# EAGLE board PROJECT_V2 (EAGLE 8.7.0)
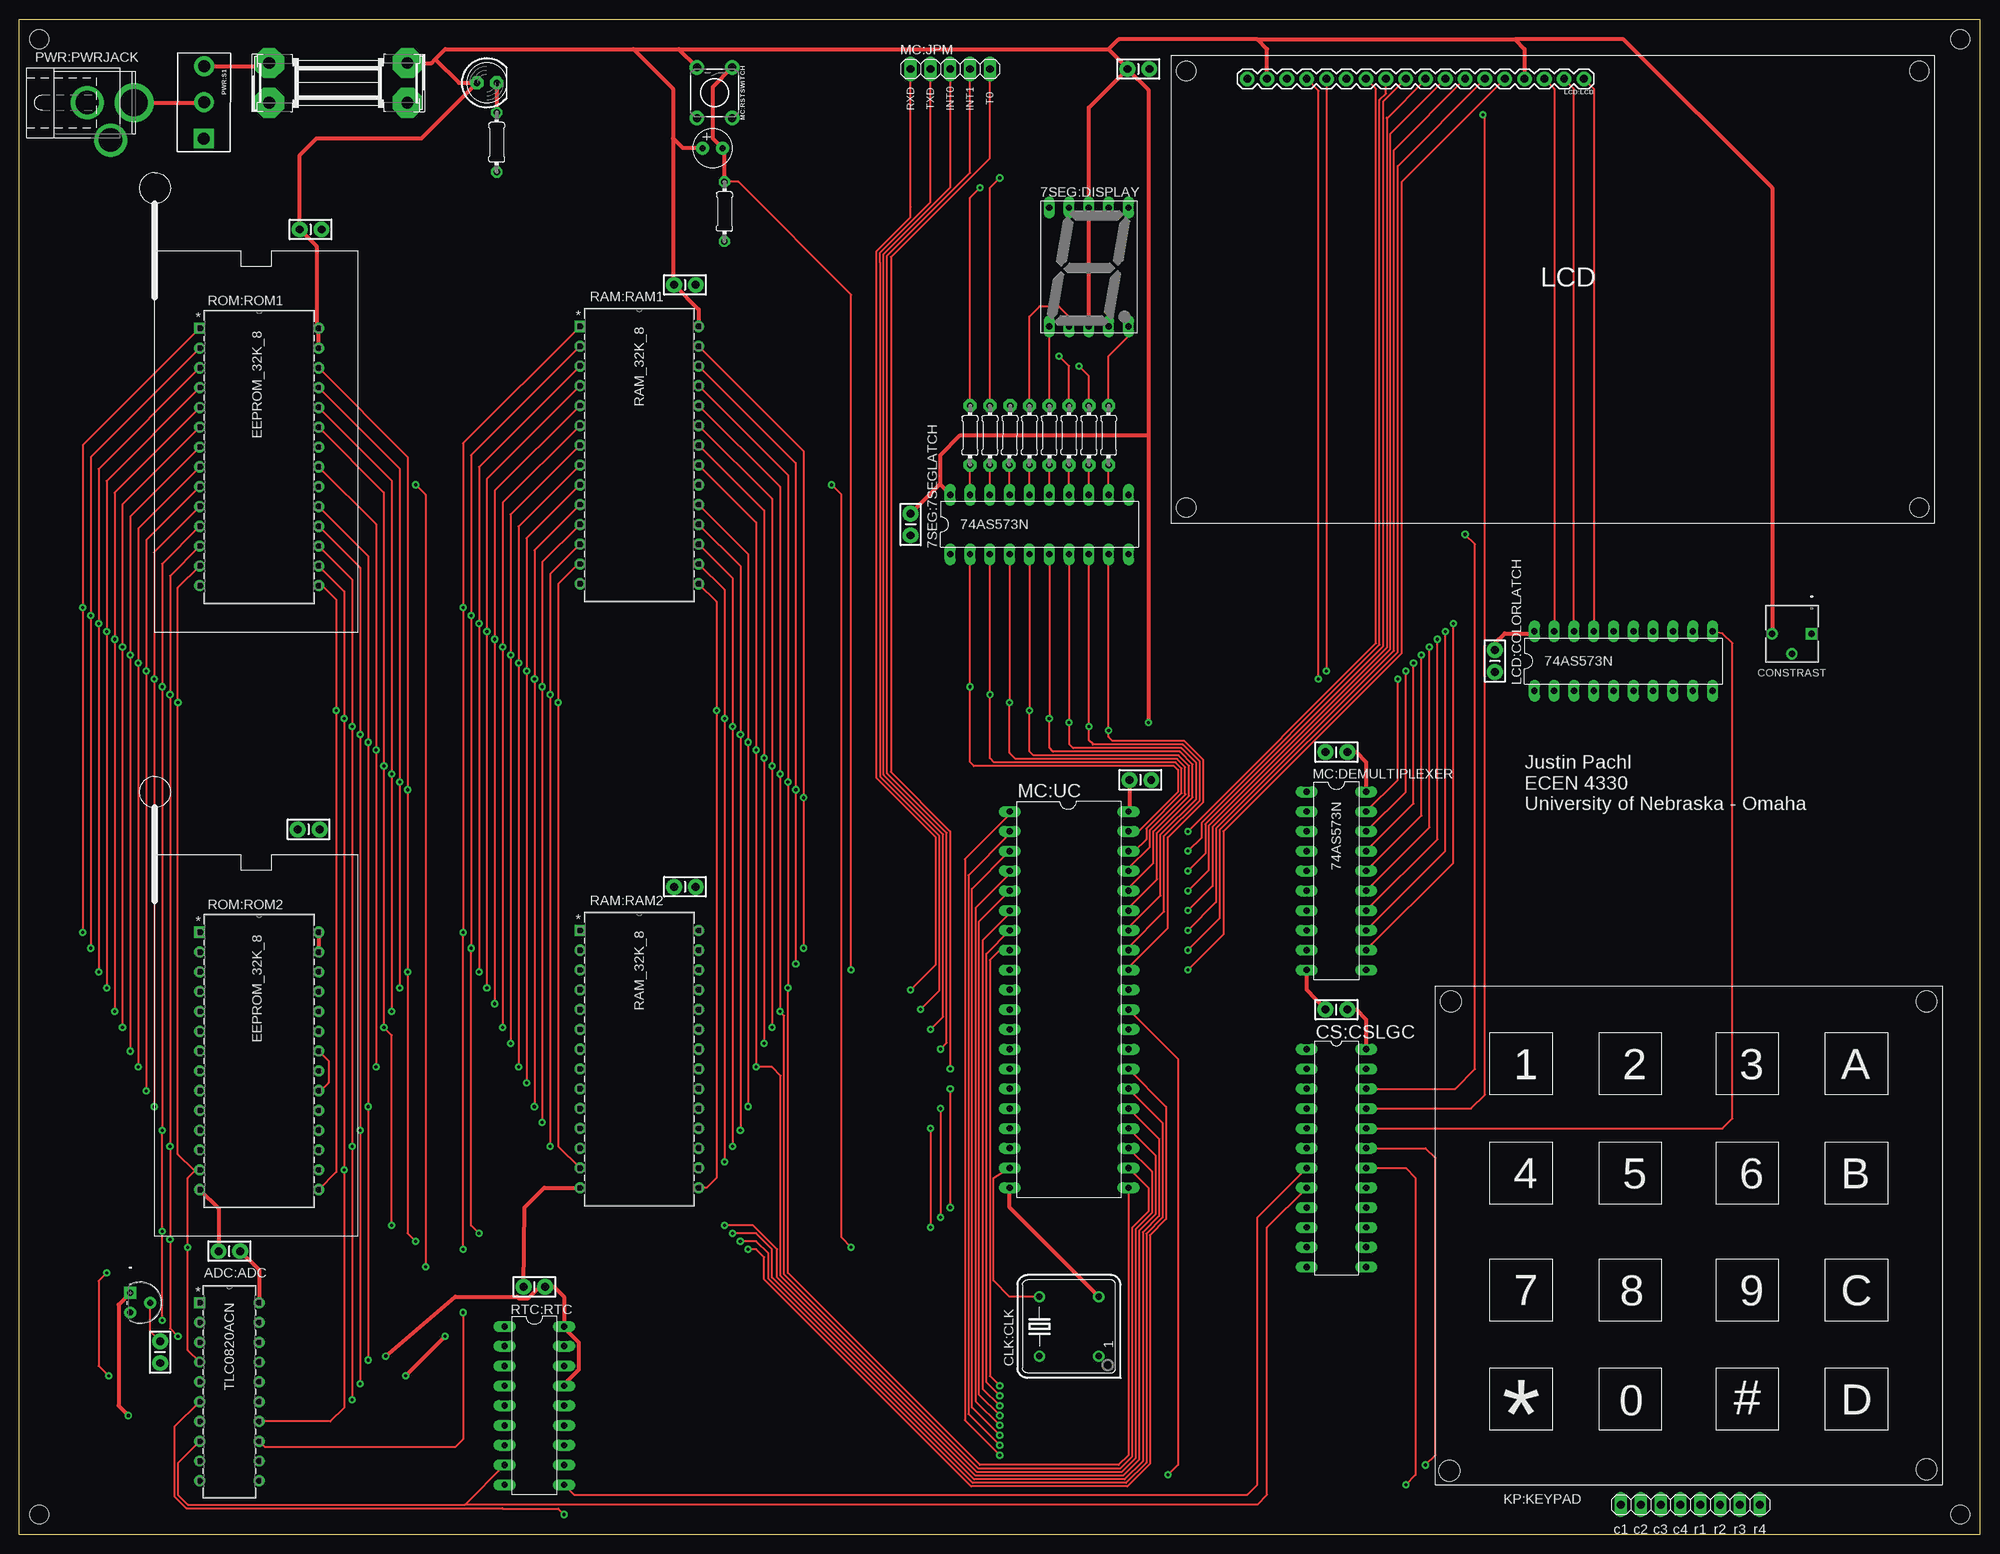
[diagram p0: board, top side]
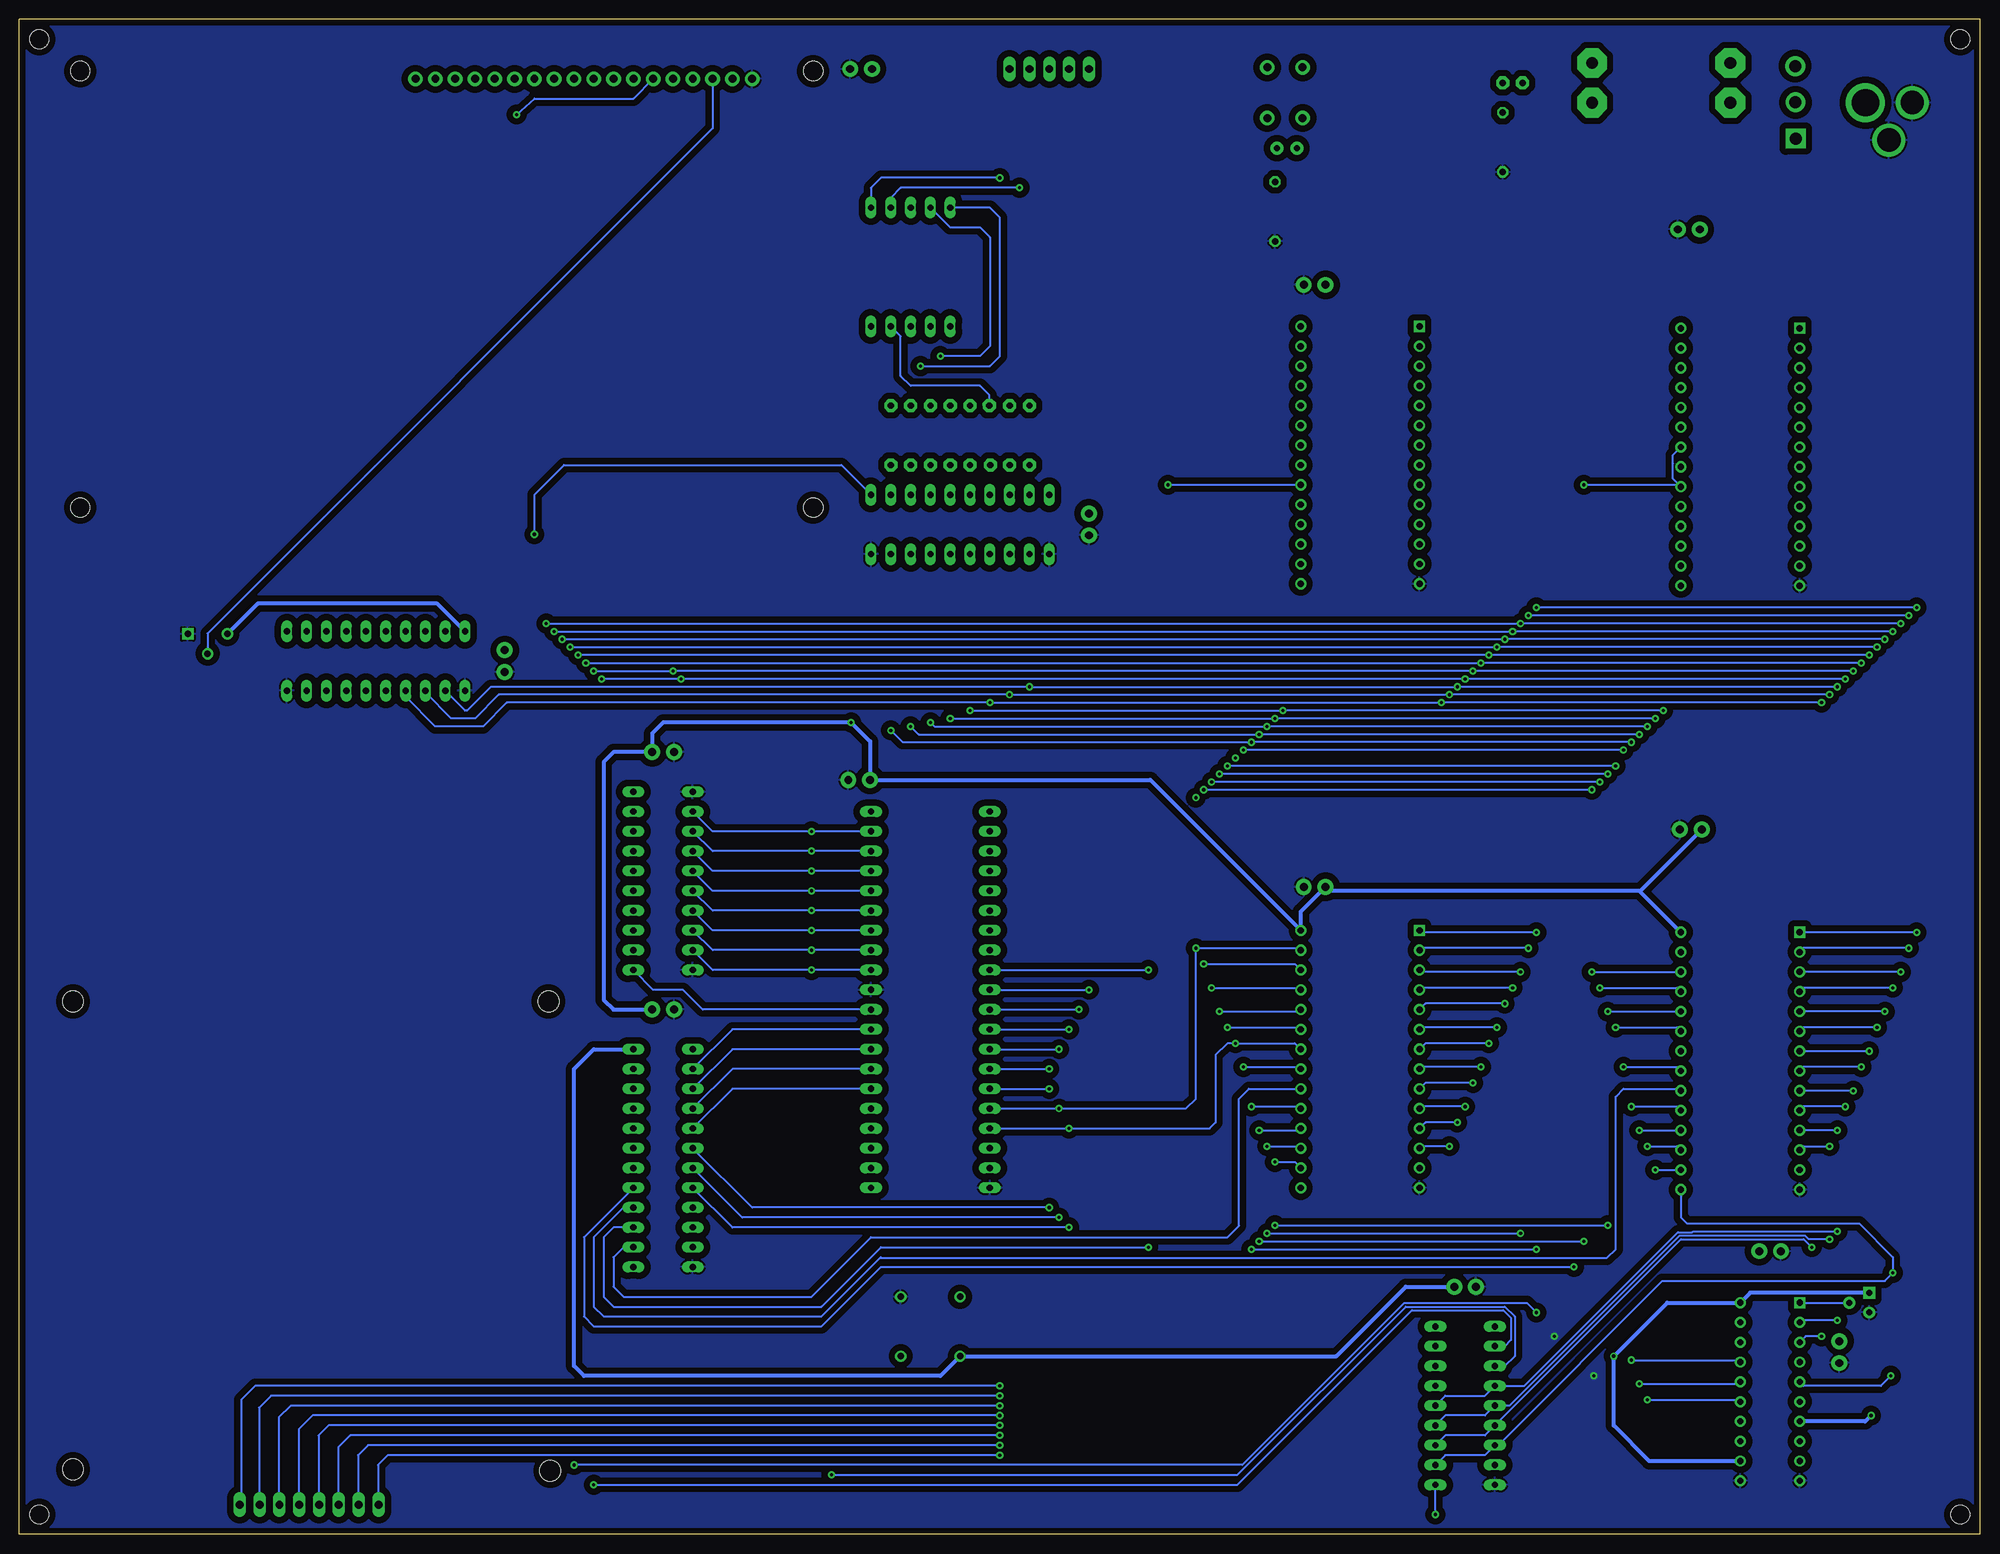
[diagram p1: board, bottom side, seen from below]

Size 251.46 x 194.31 mm. Coordinates in mm from the lower left corner, seen from the top.
Outline: 0,0 251.46,0 251.46,194.31 0,194.31 0,0
Copper layers (1*16): Top 0.035mm / dielectric 1.5mm / Bottom 0.035mm
Design rules "PROJECT_V2": minimum track width 8mil, minimum drill 15mil, track to track 0.205mm, track to pad 0.205mm, pad to pad 0.205mm, via to via 0.205mm, smd to smd 8mil, copper to edge 10mil, drill to drill 8mil, minimum pad ring 12mil, minimum via ring 10mil, stop-mask expansion 4mil, vias tented up to drill 25mil, thermal gap 10mil
Net classes: 0 default: clearance 0.205 mm
Holes 2.44 mm at 248.92,191.77 2.54,191.77 2.54,2.54 248.92,2.54

## Footprints (pad centres in the part's own frame; a part is rotated, then mirrored left to right if it is on the bottom)
DIL20 = drill 0.813 long: 1 -11.43,-3.81; 2 -8.89,-3.81; 3 -6.35,-3.81; 4 -3.81,-3.81; 5 -1.27,-3.81; 6 1.27,-3.81; 7 3.81,-3.81; 8 6.35,-3.81; 9 8.89,-3.81; 10 11.43,-3.81; 11 11.43,3.81; 12 8.89,3.81; 13 6.35,3.81; 14 3.81,3.81; 15 1.27,3.81; 16 -1.27,3.81; 17 -3.81,3.81; 18 -6.35,3.81; 19 -8.89,3.81; 20 -11.43,3.81
CAP-PTH-SMALL-KIT = drill 1.016 pad 2.032: 1 -1.397,0; 2 1.397,0
754-1460-5-ND = drill 0.813 long: 1 -5.08,-7.62; 2 -2.54,-7.62; 3 0,-7.62; 4 2.54,-7.62; 5 5.08,-7.62; 6 5.08,7.62; 7 2.54,7.62; 8 0,7.62; 9 -2.54,7.62; 10 -5.08,7.62
0204/7 = drill 0.813 pad 1.676 octagon: 1 -3.81,0; 2 3.81,0
N20 = drill 0.787 pad 1.295 square: 1 -7.62,22.86 | drill 0.787 pad 1.295: 2 -7.62,20.32; 3 -7.62,17.78; 4 -7.62,15.24; 5 -7.62,12.7; 6 -7.62,10.16; 7 -7.62,7.62; 8 -7.62,5.08; 9 -7.62,2.54; 10 -7.62,0; 11 0,0; 12 0,2.54; 13 0,5.08; 14 0,7.62; 15 0,10.16; 16 0,12.7; 17 0,15.24; 18 0,17.78; 19 0,20.32; 20 0,22.86
T_3 = drill 0.762 pad 1.524 square: 1 -2.54,-2.54 | drill 0.762 pad 1.524: 2 -1.27,0; 3 0,-2.54
DIL08S = drill 0.813: 1 -3.81,-3.81; 4 3.81,-3.81; 5 3.81,3.81; 8 -3.81,3.81
DIL24-3 = drill 0.813 long: 1 -13.97,-3.81; 2 -11.43,-3.81; 3 -8.89,-3.81; 4 -6.35,-3.81; 5 -3.81,-3.81; 6 -1.27,-3.81; 7 1.27,-3.81; 8 3.81,-3.81; 9 6.35,-3.81; 10 8.89,-3.81; 11 11.43,-3.81; 12 13.97,-3.81; 13 13.97,3.81; 14 11.43,3.81; 15 8.89,3.81; 16 6.35,3.81; 17 3.81,3.81; 18 1.27,3.81; 19 -1.27,3.81; 20 -3.81,3.81; 21 -6.35,3.81; 22 -8.89,3.81; 23 -11.43,3.81; 24 -13.97,3.81
KEYPAD4X4 = drill 1.016 long: 1 23.81,-2.54; 2 26.35,-2.54; 3 28.89,-2.54; 4 31.43,-2.54; 5 33.97,-2.54; 6 36.51,-2.54; 7 39.05,-2.54; 8 41.59,-2.54 | hole 2.692: 1.778,1.81; 2,62; 63,62; 63,2
1X18 = drill 1.016 pad 1.88: 1 43.18,0; 2 40.64,0; 3 38.1,0; 4 35.56,0; 5 33.02,0; 6 30.48,0; 7 27.94,0; 8 25.4,0; 9 22.86,0; 10 20.32,0; 11 17.78,0; 12 15.24,0; 13 12.7,0; 14 10.16,0; 15 7.62,0; 16 5.08,0; 17 2.54,0; 18 0,0 | hole 2.5: -43,-1; -43,55; 51,55; 51,-1
POT_3362P = drill 0.838 pad 1.346 square: 1 -5.08,0.076 | drill 0.838 pad 1.346: 2 -2.54,2.616; 3 0,0.076
1X05 = drill 1.016 long: 1 -5.08,0; 2 -2.54,0; 3 0,0; 4 2.54,0; 5 5.08,0
0204/7' = drill 0.813 octagon: 1 -3.81,0; 2 3.81,0
TACTILE_SWITCH_PTH_6.0MM = drill 1.016 pad 1.88: 1 -3.251,2.261; 2 3.251,2.261; 3 -3.251,-2.261; 4 3.251,-2.261
POL_5MIL = drill 0.8 pad 1.676: 1 0,0; 2 2.54,0
DIL40 = drill 0.813 long: 1 -24.13,-7.62; 2 -21.59,-7.62; 3 -19.05,-7.62; 4 -16.51,-7.62; 5 -13.97,-7.62; 6 -11.43,-7.62; 7 -8.89,-7.62; 8 -6.35,-7.62; 9 -3.81,-7.62; 10 -1.27,-7.62; 11 1.27,-7.62; 12 3.81,-7.62; 13 6.35,-7.62; 14 8.89,-7.62; 15 11.43,-7.62; 16 13.97,-7.62; 17 16.51,-7.62; 18 19.05,-7.62; 19 21.59,-7.62; 20 24.13,-7.62; 21 24.13,7.62; 22 21.59,7.62; 23 19.05,7.62; 24 16.51,7.62; 25 13.97,7.62; 26 11.43,7.62; 27 8.89,7.62; 28 6.35,7.62; 29 3.81,7.62; 30 1.27,7.62; 31 -1.27,7.62; 32 -3.81,7.62; 33 -6.35,7.62; 34 -8.89,7.62; 35 -11.43,7.62; 36 -13.97,7.62; 37 -16.51,7.62; 38 -19.05,7.62; 39 -21.59,7.62; 40 -24.13,7.62
SHK20Q = drill 1.5 pad 3.81 octagon: 1A -8.874,2.54; 1B -8.874,-2.54; 2A 8.874,2.54; 2B 8.874,-2.54
SPC4077 = drill 3 pad 4.25: 1 9.7,0; 2 12.7,-4.8 | drill 3.5 pad 5: 3 15.7,0
LED5MM = drill 0.813 pad 1.676 octagon: A -1.27,0; K 1.27,0
SPDT_EG2355-ND = drill 1.524 pad 2.54 square: 1 4.526,4.642 | drill 1.524 pad 2.54: 2 4.526,-0.008; 3 4.526,-4.658
28P6 = drill 0.813 pad 1.321 square: 1 -15.24,33.02 | drill 0.813 pad 1.321: 2 -15.24,30.48; 3 -15.24,27.94; 4 -15.24,25.4; 5 -15.24,22.86; 6 -15.24,20.32; 7 -15.24,17.78; 8 -15.24,15.24; 9 -15.24,12.7; 10 -15.24,10.16; 11 -15.24,7.62; 12 -15.24,5.08; 13 -15.24,2.54; 14 -15.24,0; 15 0,0; 16 0,2.54; 17 0,5.08; 18 0,7.62; 19 0,10.16; 20 0,12.7; 21 0,15.24; 22 0,17.78; 23 0,20.32; 24 0,22.86; 25 0,25.4; 26 0,27.94; 27 0,30.48; 28 0,33.02
28_P6 = drill 0.813 pad 1.321 square: 1 -16.24,32.02 | drill 0.813 pad 1.321: 2 -16.24,29.48; 3 -16.24,26.94; 4 -16.24,24.4; 5 -16.24,21.86; 6 -16.24,19.32; 7 -16.24,16.78; 8 -16.24,14.24; 9 -16.24,11.7; 10 -16.24,9.16; 11 -16.24,6.62; 12 -16.24,4.08; 13 -16.24,1.54; 14 -16.24,-1; 15 -1,-1; 16 -1,1.54; 17 -1,4.08; 18 -1,6.62; 19 -1,9.16; 20 -1,11.7; 21 -1,14.24; 22 -1,16.78; 23 -1,19.32; 24 -1,21.86; 25 -1,24.4; 26 -1,26.94; 27 -1,29.48; 28 -1,32.02
DIL18 = drill 0.813 long: 1 -10.16,-3.81; 2 -7.62,-3.81; 3 -5.08,-3.81; 4 -2.54,-3.81; 5 0,-3.81; 6 2.54,-3.81; 7 5.08,-3.81; 8 7.62,-3.81; 9 10.16,-3.81; 10 10.16,3.81; 11 7.62,3.81; 12 5.08,3.81; 13 2.54,3.81; 14 0,3.81; 15 -2.54,3.81; 16 -5.08,3.81; 17 -7.62,3.81; 18 -10.16,3.81

## Placement (x,y rotation side)
7SEG:7SEGLATCH  74AS573N  [DIL20]  130.81,129.54 0 top
7SEG:C1  0.1uF  [CAP-PTH-SMALL-KIT]  114.3,129.54 270 top
7SEG:DISPLAY  7_SEG  [754-1460-5-ND]  137.16,162.56 0 top
7SEG:R2  330  [0204/7]  121.92,140.97 90 top
7SEG:R3  330  [0204/7]  124.46,140.97 90 top
7SEG:R4  330  [0204/7]  127,140.97 89 top
7SEG:R5  330  [0204/7]  129.54,140.97 90 top
7SEG:R6  330  [0204/7]  132.08,140.97 90 top
7SEG:R7  330  [0204/7]  134.62,140.97 90 top
7SEG:R8  330  [0204/7]  137.16,140.97 90 top
7SEG:R9  330  [0204/7]  139.7,140.97 90 top
ADC:ADC  TLC0820ACN  [N20]  30.73,6.86 0 top
ADC:C1  0.1uF  [CAP-PTH-SMALL-KIT]  85.34,160.27 0 top
ADC:C2  0.1uF  [CAP-PTH-SMALL-KIT]  18.03,23.37 270 top
ADC:TEMPSENS  TEMP_SENSOR  [T_3]  16.76,28.45 270 top
CLK:CLK  XC269-ND  [DIL08S]  134.62,26.67 90 top
CS:C1  0.1uF  [CAP-PTH-SMALL-KIT]  168.91,67.31 180 top
CS:CSLGC  GAL22V10D  [DIL24-3]  168.91,48.26 270 top
KP:KEYPAD  [KEYPAD4X4]  181.61,6.35 0 top
LCD:C1  0.1uF  [CAP-PTH-SMALL-KIT]  37.08,90.42 0 top
LCD:C2  0.1uF  [CAP-PTH-SMALL-KIT]  85.34,83.06 0 top
LCD:COLORLATCH  74AS573N  [DIL20]  205.74,112.01 0 top
LCD:LCD  1528-1508-ND  [1X18]  200.66,186.69 180 top
LCD:R10  3362P-1-103LF_POT  [POT_3362P]  224.79,115.57 180 top
MC:C2  0.1uF  [CAP-PTH-SMALL-KIT]  26.92,36.32 180 top
MC:C3  0.1uF  [CAP-PTH-SMALL-KIT]  66.04,31.75 180 top
MC:DEMULTIPLEXER  74AS573N  [DIL20]  168.91,83.82 270 top
MC:JPM  [1X05]  119.38,187.96 0 top
MC:R1  8.2k  [0204/7']  90.42,169.67 90 top
MC:RSTSWITCH  MOMENTARY-SWITCH-SPST-PTH-6.0MM  [TACTILE_SWITCH_PTH_6.0MM]  89.15,184.91 270 top
MC:U$1  10UF  [POL_5MIL]  87.63,177.8 0 top
MC:UC  8051P  [DIL40]  134.62,68.58 270 top
PWR:PWRFUSE  2.5A  [SHK20Q]  40.89,186.18 0 top
PWR:PWRJACK  2.1mm  [SPC4077]  -1.02,183.64 0 top
PWR:PWRLED  [LED5MM]  59.94,186.18 0 top
PWR:R11  1k  [0204/7']  61.21,178.56 90 top
PWR:S1  [SPDT_EG2355-ND]  28.19,183.64 179.6 top
RAM:C1  0.1uF  [CAP-PTH-SMALL-KIT]  143.76,96.77 0 top
RAM:C2  0.1uF  [CAP-PTH-SMALL-KIT]  168.91,100.33 180 top
RAM:RAM1  RAM_32K_8  [28P6]  87.12,121.92 0 top
RAM:RAM2  RAM_32K_8  [28P6]  87.12,44.45 0 top
ROM:C1  0.1uF  [CAP-PTH-SMALL-KIT]  143.51,187.96 0 top
ROM:C2  0.1uF  [CAP-PTH-SMALL-KIT]  189.23,112.01 270 top
ROM:ROM1  EEPROM_32K_8  [28_P6]  39.37,122.68 0 top
ROM:ROM2  EEPROM_32K_8  [28_P6]  39.37,45.21 0 top
RTC:C1  0.1uF  [CAP-PTH-SMALL-KIT]  37.34,167.39 0 top
RTC:RTC  RTC-72421  [DIL18]  66.04,16.51 270 top

## Library data of the parts
7SEG:7SEGLATCH KP:KEYPAD LCD:COLORLATCH LCD:LCD MC:DEMULTIPLEXER MC:U$1 RAM:RAM1 RAM:RAM2 ROM:ROM1 ROM:ROM2 RTC:RTC = Fuckboiz
7SEG:C1 ADC:C1 ADC:C2 CS:C1 LCD:C1 LCD:C2 MC:C2 MC:C3 RAM:C1 RAM:C2 ROM:C1 ROM:C2 RTC:C1 = Fuckboiz; PROD_ID: CAP-08370
7SEG:DISPLAY MC:UC PWR:PWRFUSE PWR:PWRJACK = Fuckboiz; OC_FARNELL: unknown; OC_NEWARK: unknown
7SEG:R2-7SEG:R9 PWR:PWRLED = adafruit
ADC:ADC = Fuckboiz; MANUFACTURER_PART_NUMBER: TLC0820ACN; VENDOR: Texas Instruments
ADC:TEMPSENS = Fuckboiz; MANUFACTURER_PART_NUMBER: TMP36GT9Z; VENDOR: Analog Devices Inc
CLK:CLK = crystal; OC_FARNELL: unknown; OC_NEWARK: unknown
CS:CSLGC = pal; MPN: GAL22V10D-7LPN; OC_FARNELL: 1571925; OC_NEWARK: 97M0480
LCD:R10 = Fuckboiz; MANUFACTURER_PART_NUMBER: 3362P1103LF; VENDOR: Bourns Electronics
MC:JPM = pinhead
MC:R1 = rcl; SPICEPREFIX: R
MC:RSTSWITCH = SparkFun-Switches; PROD_ID: SWCH-08441; SF_SKU: COM-00097
PWR:R11 = resistor
PWR:S1 = Fuckboiz; PROD_ID: SWCH-08261; SF_SKU: COM-00102

## Nets
7SEG:N$3: 7SEG:7SEGLATCH.19 7SEG:R2.1
7SEG:N$4: 7SEG:7SEGLATCH.18 7SEG:R3.1
7SEG:N$5: 7SEG:7SEGLATCH.17 7SEG:R4.1
7SEG:N$6: 7SEG:7SEGLATCH.16 7SEG:R5.1
7SEG:N$7: 7SEG:7SEGLATCH.15 7SEG:R6.1
7SEG:N$8: 7SEG:7SEGLATCH.14 7SEG:R7.1
7SEG:N$9: 7SEG:7SEGLATCH.13 7SEG:R8.1
7SEG:N$10: 7SEG:DISPLAY.10 7SEG:R8.2
7SEG:N$11: 7SEG:DISPLAY.9 7SEG:R7.2
7SEG:N$12: 7SEG:DISPLAY.1 7SEG:R6.2
7SEG:N$13: 7SEG:DISPLAY.2 7SEG:R5.2
7SEG:N$14: 7SEG:DISPLAY.4 7SEG:R4.2
7SEG:N$33: 7SEG:DISPLAY.6 7SEG:R3.2
7SEG:N$43: 7SEG:DISPLAY.7 7SEG:R2.2
7SEG:N$44: 7SEG:DISPLAY.5 7SEG:R9.2
7SEG:N$45: 7SEG:7SEGLATCH.12 7SEG:R9.1
7SEGCSWR: 7SEG:7SEGLATCH.11 CS:CSLGC.22
A0: LCD:LCD.4 MC:DEMULTIPLEXER.19 RAM:RAM1.10 RAM:RAM2.10 ROM:ROM1.10 ROM:ROM2.10
A1: LCD:LCD.5 MC:DEMULTIPLEXER.18 RAM:RAM1.9 RAM:RAM2.9 ROM:ROM1.9 ROM:ROM2.9
A2: MC:DEMULTIPLEXER.17 RAM:RAM1.8 RAM:RAM2.8 ROM:ROM1.8 ROM:ROM2.8
A3: MC:DEMULTIPLEXER.16 RAM:RAM1.7 RAM:RAM2.7 ROM:ROM1.7 ROM:ROM2.7
A4: MC:DEMULTIPLEXER.15 RAM:RAM1.6 RAM:RAM2.6 ROM:ROM1.6 ROM:ROM2.6
A5: MC:DEMULTIPLEXER.14 RAM:RAM1.5 RAM:RAM2.5 ROM:ROM1.5 ROM:ROM2.5
A6: MC:DEMULTIPLEXER.13 RAM:RAM1.4 RAM:RAM2.4 ROM:ROM1.4 ROM:ROM2.4
A7: MC:DEMULTIPLEXER.12 RAM:RAM1.3 RAM:RAM2.3 ROM:ROM1.3 ROM:ROM2.3
A8: MC:UC.21 RAM:RAM1.25 RAM:RAM2.25 ROM:ROM1.25 ROM:ROM2.25
A9: MC:UC.22 RAM:RAM1.24 RAM:RAM2.24 ROM:ROM1.24 ROM:ROM2.24
A10: MC:UC.23 RAM:RAM1.21 RAM:RAM2.21 ROM:ROM1.21 ROM:ROM2.21
A11: MC:UC.24 RAM:RAM1.23 RAM:RAM2.23 ROM:ROM1.23 ROM:ROM2.23
A12: MC:UC.25 RAM:RAM1.2 RAM:RAM2.2 ROM:ROM1.2 ROM:ROM2.2
A13: CS:CSLGC.5 MC:UC.26 RAM:RAM1.26 RAM:RAM2.26 ROM:ROM1.26 ROM:ROM2.26
A14: CS:CSLGC.4 MC:UC.27 RAM:RAM1.1 RAM:RAM2.1 ROM:ROM1.1 ROM:ROM2.1
A15: CS:CSLGC.3 MC:UC.28
ADC:N$26: ADC:ADC.1 ADC:C2.1 ADC:TEMPSENS.2
ADC:N$27: ADC:ADC.9
ADC:N$28: ADC:ADC.18
ADCCS: ADC:ADC.13 CS:CSLGC.19
ALE: MC:DEMULTIPLEXER.11 MC:UC.30 RTC:RTC.3
CLKSIG: CLK:CLK.5 MC:UC.19
COLORCS: CS:CSLGC.20 LCD:COLORLATCH.11
CS:N$1: CS:CSLGC.9
CS:N$2: CS:CSLGC.10
CS:N$3: CS:CSLGC.11
CS:N$4: CS:CSLGC.13
CS:N$35: CS:CSLGC.1
D0: 7SEG:7SEGLATCH.2 ADC:ADC.2 LCD:COLORLATCH.2 LCD:LCD.7 MC:DEMULTIPLEXER.2 MC:UC.39 RAM:RAM1.11 RAM:RAM2.11 ROM:ROM1.11 ROM:ROM2.11 RTC:RTC.4 RTC:RTC.14
D1: 7SEG:7SEGLATCH.3 ADC:ADC.3 LCD:COLORLATCH.3 LCD:LCD.8 MC:DEMULTIPLEXER.3 MC:UC.38 RAM:RAM1.12 RAM:RAM2.12 ROM:ROM1.12 ROM:ROM2.12 RTC:RTC.5 RTC:RTC.13
D2: 7SEG:7SEGLATCH.4 ADC:ADC.4 LCD:COLORLATCH.4 LCD:LCD.9 MC:DEMULTIPLEXER.4 MC:UC.37 RAM:RAM1.13 RAM:RAM2.13 ROM:ROM1.13 ROM:ROM2.13 RTC:RTC.6 RTC:RTC.12
D3: 7SEG:7SEGLATCH.5 ADC:ADC.5 LCD:LCD.10 MC:DEMULTIPLEXER.5 MC:UC.36 RAM:RAM1.15 RAM:RAM2.15 ROM:ROM1.15 ROM:ROM2.15 RTC:RTC.7 RTC:RTC.11
D4: 7SEG:7SEGLATCH.6 ADC:ADC.14 LCD:LCD.11 MC:DEMULTIPLEXER.6 MC:UC.35 RAM:RAM1.16 RAM:RAM2.16 ROM:ROM1.16 ROM:ROM2.16
D5: 7SEG:7SEGLATCH.7 ADC:ADC.15 LCD:LCD.12 MC:DEMULTIPLEXER.7 MC:UC.34 RAM:RAM1.17 RAM:RAM2.17 ROM:ROM1.17 ROM:ROM2.17
D6: 7SEG:7SEGLATCH.8 ADC:ADC.16 LCD:LCD.13 MC:DEMULTIPLEXER.8 MC:UC.33 RAM:RAM1.18 RAM:RAM2.18 ROM:ROM1.18 ROM:ROM2.18
D7: 7SEG:7SEGLATCH.9 ADC:ADC.17 LCD:LCD.14 MC:DEMULTIPLEXER.9 MC:UC.32 RAM:RAM1.19 RAM:RAM2.19 ROM:ROM1.19 ROM:ROM2.19
GND: 7SEG:7SEGLATCH.1 7SEG:7SEGLATCH.10 7SEG:C1.2 ADC:ADC.10 ADC:ADC.11 ADC:C1.2 ADC:C2.2 ADC:TEMPSENS.3 CLK:CLK.4 CS:C1.2 CS:CSLGC.12 LCD:C1.2 LCD:C2.2 LCD:COLORLATCH.1 LCD:COLORLATCH.10 LCD:LCD.1 LCD:R10.1 MC:C2.2 MC:C3.2 MC:DEMULTIPLEXER.1 MC:DEMULTIPLEXER.10 MC:R1.1 MC:UC.20 MC:UC.31 PWR:PWRJACK.1 PWR:PWRJACK.2 PWR:R11.1 RAM:C1.2 RAM:C2.2 RAM:RAM1.14 RAM:RAM2.14 ROM:C1.2 ROM:C2.2 ROM:ROM1.14 ROM:ROM2.14 RTC:C1.2 RTC:RTC.9
LCD:N$16: LCD:LCD.3 LCD:R10.2
LCD:N$17: LCD:COLORLATCH.19 LCD:LCD.16
LCD:N$23: LCD:COLORLATCH.18 LCD:LCD.17
LCD:N$24: LCD:COLORLATCH.17 LCD:LCD.18
LCD:N$32: LCD:COLORLATCH.5
LCD:N$34: LCD:COLORLATCH.6
LCD:N$36: LCD:COLORLATCH.7
LCD:N$37: LCD:COLORLATCH.8
LCD:N$38: LCD:COLORLATCH.9
LCD:N$39: LCD:COLORLATCH.16
LCD:N$40: LCD:COLORLATCH.15
LCD:N$41: LCD:COLORLATCH.14
LCD:N$42: LCD:COLORLATCH.13
LCD:N$46: LCD:COLORLATCH.12
LCDCS: CS:CSLGC.21 LCD:LCD.6
MC:INT0: MC:JPM.3 MC:UC.12
MC:INT1: MC:JPM.4 MC:UC.13
MC:N$15: MC:R1.2 MC:RSTSWITCH.1 MC:U$1.2 MC:UC.9
MC:N$31: MC:UC.18
MC:RXD: MC:JPM.1 MC:UC.10
MC:T0: MC:JPM.5 MC:UC.14
MC:TXD: MC:JPM.2 MC:UC.11
P3.5: CS:CSLGC.6 MC:UC.15
PONE0: KP:KEYPAD.1 MC:UC.1
PONE1: KP:KEYPAD.2 MC:UC.2
PONE2: KP:KEYPAD.3 MC:UC.3
PONE3: KP:KEYPAD.4 MC:UC.4
PONE4: KP:KEYPAD.5 MC:UC.5
PONE5: KP:KEYPAD.6 MC:UC.6
PONE6: KP:KEYPAD.7 MC:UC.7
PONE7: KP:KEYPAD.8 MC:UC.8
PSEN: CS:CSLGC.2 MC:UC.29
PWR:N$2: PWR:PWRFUSE.1A PWR:S1.3
PWR:N$30: PWR:S1.1
PWR:N$48: PWR:PWRJACK.3 PWR:S1.2
PWR:N$49: PWR:PWRLED.K PWR:R11.2
RAM1CS: CS:CSLGC.15 RAM:RAM1.20
RAM2CS: CS:CSLGC.14 RAM:RAM2.20
RD: ADC:ADC.8 CS:CSLGC.8 MC:UC.17 RAM:RAM1.22 RAM:RAM2.22 RTC:RTC.8
ROM1CS: CS:CSLGC.17 ROM:ROM1.20 ROM:ROM1.22
ROM2CS: CS:CSLGC.16 ROM:ROM2.20 ROM:ROM2.22
RTC:N$1: RTC:RTC.1
RTC:N$25: RTC:RTC.16
RTC:N$29: RTC:RTC.17
RTCCS: CS:CSLGC.18 RTC:RTC.2
VCC: 7SEG:7SEGLATCH.20 7SEG:C1.1 7SEG:DISPLAY.3 7SEG:DISPLAY.8 ADC:ADC.7 ADC:ADC.12 ADC:ADC.20 ADC:C1.1 ADC:TEMPSENS.1 CLK:CLK.8 CS:C1.1 CS:CSLGC.24 LCD:C1.1 LCD:C2.1 LCD:COLORLATCH.20 LCD:LCD.2 LCD:LCD.15 LCD:R10.3 MC:C2.1 MC:C3.1 MC:DEMULTIPLEXER.20 MC:RSTSWITCH.3 MC:U$1.1 MC:UC.40 PWR:PWRFUSE.2A PWR:PWRLED.A RAM:C1.1 RAM:C2.1 RAM:RAM1.28 RAM:RAM2.28 ROM:C1.1 ROM:C2.1 ROM:ROM1.27 ROM:ROM1.28 ROM:ROM2.27 ROM:ROM2.28 RTC:C1.1 RTC:RTC.15 RTC:RTC.18
WR: ADC:ADC.6 CS:CSLGC.7 MC:UC.16 RAM:RAM1.27 RAM:RAM2.27 RTC:RTC.10

## Tracks (layer width: path | path; a pad name or v marks a point on that pad's centre or on a via)
7SEG:N$3
  Top 0.254: 7SEG:7SEGLATCH.19 7SEG:R2.1
7SEG:N$4
  Top 0.254: 7SEG:7SEGLATCH.18 7SEG:R3.1
7SEG:N$5
  Top 0.254: 7SEG:7SEGLATCH.17 127,137.09 7SEG:R4.1
7SEG:N$6
  Top 0.254: 7SEG:7SEGLATCH.16 7SEG:R5.1
7SEG:N$7
  Top 0.254: 7SEG:7SEGLATCH.15 7SEG:R6.1
7SEG:N$8
  Top 0.254: 7SEG:7SEGLATCH.14 7SEG:R7.1
7SEG:N$9
  Top 0.254: 7SEG:7SEGLATCH.13 7SEG:R8.1
7SEG:N$10  (via drill 0.4)
  Top 0.254: 7SEG:R8.2 137.16,148.59 v135.89,149.86
  Bottom 0.254: 7SEG:DISPLAY.10 127,170.18 125.73,168.91 125.73,151.13 127,149.86 v135.89,149.86
7SEG:N$11  (via drill 0.4)
  Top 0.254: 7SEG:R7.2 134.62,149.86 v133.35,151.13
  Bottom 0.254: 7SEG:DISPLAY.9 132.08,167.64 128.27,167.64 127,166.37 127,152.4 128.27,151.13 v133.35,151.13
7SEG:N$12
  Top 0.254: 7SEG:R6.2 7SEG:DISPLAY.1
7SEG:N$13
  Top 0.254: 7SEG:R5.2 129.54,156.21 130.81,157.48 133.35,157.48 134.62,156.21 7SEG:DISPLAY.2
7SEG:N$14
  Bottom 0.254: 7SEG:R4.2 127.07,146.12 128.27,147.32 137.16,147.32 138.43,148.59 138.43,153.67 7SEG:DISPLAY.4
7SEG:N$33  (via drill 0.4)
  Top 0.254: 7SEG:R3.2 124.46,172.72 v125.73,173.99
  Bottom 0.254: v125.73,173.99 140.97,173.99 142.24,172.72 7SEG:DISPLAY.6
7SEG:N$43  (via drill 0.4)
  Top 0.254: 7SEG:R2.2 121.92,171.45 v123.19,172.72
  Bottom 0.254: v123.19,172.72 138.43,172.72 139.7,171.45 7SEG:DISPLAY.7
7SEG:N$44
  Top 0.254: 7SEG:R9.2 139.7,151.13 142.24,153.67 7SEG:DISPLAY.5
7SEG:N$45
  Top 0.254: 7SEG:7SEGLATCH.12 7SEG:R9.1
7SEGCSWR  (via drill 0.4)
  Top 0.254: CS:CSLGC.22 184.15,57.15 186.69,59.69 186.69,127 v185.42,128.27
  Bottom 0.254: v185.42,128.27 185.42,133.35 181.61,137.16 146.05,137.16 7SEG:7SEGLATCH.11
A0  (via drill 0.4)
  Top 0.254: ROM:ROM1.10 17.27,125.98 v17.27,109.73 v17.27,54.86 | RAM:RAM1.10 66.04,126.24 v66.04,109.73 v66.04,54.86 | MC:DEMULTIPLEXER.19 176.78,96.77 v176.78,109.73 | v166.62,109.73 166.62,185.17 LCD:LCD.4
  Bottom 0.254: v17.27,54.86 22.64,54.86 ROM:ROM2.10 | v66.04,54.86 71.63,54.86 RAM:RAM2.10 | v17.27,109.73 v66.04,109.73 v166.62,109.73 v176.78,109.73 | MC:DEMULTIPLEXER.19 172.97,92.71
A1  (via drill 0.4)
  Top 0.254: ROM:ROM1.9 16.26,127.51 v16.26,110.74 v16.26,56.9 | RAM:RAM1.9 65.02,127.76 v65.02,110.74 v65.02,57.91 | MC:DEMULTIPLEXER.18 177.8,95.25 v177.8,110.74 | LCD:LCD.5 v167.64,110.74
  Bottom 0.254: v16.26,56.9 23.11,56.9 ROM:ROM2.9 | v65.02,57.91 71.12,57.91 RAM:RAM2.9 | v16.26,110.74 v65.02,110.74 v167.64,110.74 v177.8,110.74 | MC:DEMULTIPLEXER.18 172.72,90.52
A2  (via drill 0.4)
  Top 0.254: ROM:ROM1.8 15.24,129.03 v15.24,111.76 v15.24,59.94 | RAM:RAM1.8 64.01,129.29 v64.01,111.76 v64.01,59.94 | MC:DEMULTIPLEXER.17 178.82,93.73 v178.82,111.76
  Bottom 0.254: v15.24,59.94 22.64,59.94 ROM:ROM2.8 | v64.01,59.94 71.63,59.94 RAM:RAM2.8 | v15.24,111.76 v64.01,111.76 v178.82,111.76
A3  (via drill 0.4)
  Top 0.254: ROM:ROM1.7 14.22,130.56 v14.22,112.78 v14.22,61.98 | RAM:RAM1.7 62.99,130.81 v62.99,112.78 v62.99,62.99 | MC:DEMULTIPLEXER.16 179.83,92.2 v179.83,112.78
  Bottom 0.254: v14.22,61.98 23.11,61.98 ROM:ROM2.7 | v62.99,62.99 71.12,62.99 RAM:RAM2.7 | v14.22,112.78 v62.99,112.78 v179.83,112.78
A4  (via drill 0.4)
  Top 0.254: ROM:ROM1.6 13.21,132.08 v13.21,113.79 v13.21,65.02 | RAM:RAM1.6 61.98,132.33 v61.98,113.79 v61.98,65.02 | MC:DEMULTIPLEXER.15 180.85,90.68 v180.85,113.79
  Bottom 0.254: v13.21,65.02 22.64,65.02 ROM:ROM2.6 | v61.98,65.02 71.63,65.02 RAM:RAM2.6 | v13.21,113.79 v61.98,113.79 v180.85,113.79
A5  (via drill 0.4)
  Top 0.254: ROM:ROM1.5 12.19,133.6 v12.19,114.81 v12.19,67.06 | RAM:RAM1.5 60.96,133.86 v60.96,114.81 v60.96,68.07 | MC:DEMULTIPLEXER.14 181.86,89.15 v181.86,114.81
  Bottom 0.254: v12.19,67.06 23.11,67.06 ROM:ROM2.5 | v60.96,68.07 71.12,68.07 RAM:RAM2.5 | v12.19,114.81 v60.96,114.81 v181.86,114.81
A6  (via drill 0.4)
  Top 0.254: ROM:ROM1.4 11.18,135.13 v11.18,115.82 v11.18,70.1 | RAM:RAM1.4 59.94,135.38 v59.94,115.82 v59.94,70.1 | MC:DEMULTIPLEXER.13 182.88,87.63 v182.88,115.82
  Bottom 0.254: v11.18,70.1 22.64,70.1 ROM:ROM2.4 | v59.94,70.1 71.63,70.1 RAM:RAM2.4 | v11.18,115.82 v59.94,115.82 v182.88,115.82
A7  (via drill 0.4)
  Top 0.254: ROM:ROM1.3 10.16,136.65 v10.16,116.84 v10.16,72.14 | RAM:RAM1.3 58.93,136.91 v58.93,116.84 v58.93,72.14 | MC:DEMULTIPLEXER.12 183.9,86.11 v183.9,116.84
  Bottom 0.254: v10.16,72.14 23.11,72.14 ROM:ROM2.3 | v58.93,72.14 71.63,72.14 RAM:RAM2.3 | v10.16,116.84 v58.93,116.84 v183.9,116.84
A8  (via drill 0.4)
  Top 0.254: ROM:ROM1.25 48.77,136.68 v48.77,96.52 v48.77,70.1 | RAM:RAM1.25 98.55,135.89 v98.55,96.52 v98.55,70.1 98.55,33.53 123.19,8.89 140.97,8.89 142.24,10.16 MC:UC.21
  Bottom 0.254: v48.77,70.1 38.86,70.1 ROM:ROM2.25 | v98.55,70.1 87.38,70.1 RAM:RAM2.25 | v48.77,96.52 v98.55,96.52
A9  (via drill 0.4)
  Top 0.254: ROM:ROM1.24 47.75,135.16 v47.75,97.54 v47.75,67.06 | RAM:RAM1.24 97.54,134.37 v97.54,97.54 v97.54,67.06 98.09,66.5 98.09,33.34 123,8.43 141.16,8.43 142.7,9.97 142.7,39.32 144.78,41.4 144.78,44.45 MC:UC.22
  Bottom 0.254: v47.75,67.06 38.39,67.06 ROM:ROM2.24 | v97.54,67.06 87.38,67.06 RAM:RAM2.24 | v47.75,97.54 v97.54,97.54
A10  (via drill 0.4)
  Top 0.254: ROM:ROM1.21 45.72,129.57 v45.72,100.58 v45.72,59.94 | RAM:RAM1.21 94.49,129.79 v94.49,100.58 v94.49,59.94 96.52,59.94 97.63,58.83 97.63,33.15 122.81,7.97 141.35,7.97 143.16,9.78 143.16,39.13 145.24,41.21 145.24,46.53 MC:UC.23
  Bottom 0.254: v45.72,59.94 38.86,59.94 ROM:ROM2.21 | v94.49,59.94 87.38,59.94 RAM:RAM2.21 | v45.72,100.58 v94.49,100.58
A11  (via drill 0.4)
  Top 0.254: ROM:ROM1.23 46.74,133.64 v46.74,98.55 v46.74,65.02 47.75,64.01 v47.75,39.62 | RAM:RAM1.23 96.52,132.84 v96.52,98.55 v96.52,65.02 | MC:UC.24 145.7,48.61 145.7,41.02 143.62,38.94 143.62,9.59 141.54,7.51 122.62,7.51 97.17,32.96 97.17,36.57 94.12,39.62 v90.42,39.62
  Bottom 0.254: v46.74,65.02 38.86,65.02 ROM:ROM2.23 | v96.52,65.02 87.38,65.02 RAM:RAM2.23 | v46.74,98.55 v96.52,98.55 | v90.42,39.62 v47.75,39.62
A12  (via drill 0.4)
  Top 0.254: ROM:ROM1.2 9.14,138.18 v9.14,117.86 v9.14,75.18 | RAM:RAM1.2 57.91,138.43 v57.91,117.86 v57.91,75.18 57.91,39.62 v58.93,38.61 | MC:UC.25 146.16,50.69 146.16,40.83 144.08,38.75 144.08,9.4 141.73,7.05 122.43,7.05 96.52,32.96 96.52,36.58 94.49,38.61 v91.44,38.61
  Bottom 0.254: v9.14,75.18 22.64,75.18 ROM:ROM2.2 | v57.91,75.18 71.63,75.18 RAM:RAM2.2 | v9.14,117.86 v57.91,117.86 | v91.44,38.61 v58.93,38.61
A13  (via drill 0.4)
  Top 0.254: ROM:ROM1.26 49.78,138.21 v49.78,95.5 v49.78,72.14 49.78,38.61 v50.8,37.59 | RAM:RAM1.26 99.57,137.41 v99.57,95.5 v99.57,73.15 | MC:UC.26 146.62,52.77 146.62,40.64 144.53,38.56 144.53,9.21 141.92,6.59 122.24,6.59 96.06,32.77 96.06,36.02 94.49,37.59 v92.46,37.59
  Bottom 0.254: v49.78,72.14 38.39,72.14 ROM:ROM2.26 | v99.57,73.15 87.88,73.15 RAM:RAM2.26 | v49.78,95.5 v99.57,95.5 | MC:UC.26 160.02,57.15 CS:CSLGC.5 | v92.46,37.59 v50.8,37.59
A14  (via drill 0.4)
  Top 0.254: ROM:ROM1.1 8.13,139.7 v8.13,118.87 v8.13,77.22 | RAM:RAM1.1 56.9,139.95 v56.9,118.87 v56.9,77.22 v56.9,36.58 | MC:UC.27 147.07,54.85 147.07,40.45 144.99,38.37 144.99,9.02 142.11,6.14 122.05,6.14 95.5,32.68 95.5,35.56 94.49,36.58 v93.47,36.58
  Bottom 0.254: v8.13,77.22 23.11,77.22 ROM:ROM2.1 | v56.9,77.22 71.63,77.22 RAM:RAM2.1 | v8.13,118.87 v56.9,118.87 | MC:UC.27 160.02,59.69 CS:CSLGC.4 | v93.47,36.58 v56.9,36.58
A15
  Bottom 0.254: CS:CSLGC.3 160.02,62.23 MC:UC.28
ADC:N$26
  Top 0.254: ADC:C2.1 16.76,26.04 ADC:TEMPSENS.2
  Bottom 0.254: ADC:ADC.1 ADC:TEMPSENS.2
ADCCS  (via drill 0.4)
  Top 0.254: CS:CSLGC.19 180.34,49.53 181.61,48.26 181.61,10.16 v180.34,8.89 | v56.9,28.45 56.9,12.19 55.88,11.18 31.5,11.18 ADC:ADC.13
  Bottom 0.254: v56.9,28.45 58.12,29.67 73.85,29.67 94.63,8.89 v180.34,8.89
ALE  (via drill 0.4)
  Top 0.254: MC:UC.30 148.59,60.96 148.59,8.89 v147.32,7.62
  Bottom 0.254: RTC:RTC.3 60.96,21.59 59.69,22.86 59.69,27.94 60.96,29.21 73.66,29.21 95.25,7.62 v147.32,7.62 | MC:UC.30 163.83,67.31 166.37,69.85 170.18,69.85 MC:DEMULTIPLEXER.11
CLKSIG
  Top 0.254: CLK:CLK.5 127,30.48 124.92,32.56 124.92,45.72 MC:UC.19
COLORCS
  Top 0.254: CS:CSLGC.20 218.44,52.07 219.71,53.34 219.71,114.3 218.44,115.57 LCD:COLORLATCH.11
D0  (via drill 0.4)
  Top 0.254: ROM:ROM1.11 18.29,124.46 v18.29,108.71 v18.29,51.82 v18.29,38.86 v18.29,27.43 | RAM:RAM1.11 67.06,124.71 v67.06,108.71 v67.06,52.83 | 7SEG:7SEGLATCH.2 v121.92,108.71 121.92,99.06 122.43,98.55 148.08,98.55 148.59,98.04 148.59,95.25 143.51,90.17 MC:UC.39 | v149.86,90.17 173.99,114.3 173.99,185.42 LCD:LCD.7
  Bottom 0.254: RTC:RTC.14 68.58,17.78 63.5,17.78 RTC:RTC.4 | v18.29,51.82 23.11,51.82 ROM:ROM2.11 | v18.29,27.43 22.86,27.43 ADC:ADC.2 | RTC:RTC.4 61.98,19.3 | v67.06,52.83 71.12,52.83 RAM:RAM2.11 | v18.29,108.71 v67.06,108.71 v121.92,108.71 191.01,108.71 194.06,105.66 194.31,105.66 LCD:COLORLATCH.2 | MC:UC.39 v149.86,90.17 162.56,90.17 MC:DEMULTIPLEXER.2 | RTC:RTC.4 58.45,19.05 38.73,38.76 36.93,38.76 36.83,38.86 v18.29,38.86
D1  (via drill 0.4)
  Top 0.254: ROM:ROM1.12 19.3,122.94 v19.3,107.7 v19.3,49.78 v19.3,37.85 19.3,26.42 v20.32,25.4 | RAM:RAM1.12 68.07,123.19 v68.07,107.7 v68.07,49.78 | 7SEG:7SEGLATCH.3 v124.46,107.7 124.46,99.57 125.02,99.01 148.27,99.01 149.05,98.23 149.05,95.06 144.53,90.54 144.53,89.15 143,87.63 MC:UC.38 | v149.86,87.63 151.64,89.41 151.64,91.3 174.45,114.11 174.45,183.99 175.26,184.8 LCD:LCD.8
  Bottom 0.254: RTC:RTC.13 68.58,15.24 63.5,15.24 RTC:RTC.5 60.34,16.51 38.54,38.3 22.42,38.3 21.96,37.85 v19.3,37.85 19.3,37.94 | v20.32,25.4 22.35,25.4 ADC:ADC.3 | v68.07,49.78 71.63,49.78 RAM:RAM2.12 | v19.3,107.7 v68.07,107.7 v124.46,107.7 189.99,107.7 193.04,104.65 196.09,104.65 199.39,107.95 LCD:COLORLATCH.3 | ROM:ROM2.12 22.64,49.78 v19.3,49.78 | MC:UC.38 v149.86,87.63 162.56,87.63 MC:DEMULTIPLEXER.3
D2  (via drill 0.4)
  Top 0.254: ROM:ROM2.13 22.62,46.75 | 22.62,46.75 22.34,46.75 20.32,48.77 v20.32,106.68 20.32,121.41 ROM:ROM1.13 | RAM:RAM1.13 71.63,124.46 69.09,121.92 v69.09,106.68 69.09,49.78 RAM:RAM2.13 | 7SEG:7SEGLATCH.4 v127,106.68 127,100.23 127.76,99.47 148.46,99.47 149.51,98.42 149.51,94.97 149.56,94.92 144.99,90.35 144.99,88.19 142.24,85.44 MC:UC.37 | v149.86,85.09 152.1,87.33 152.1,91.11 174.91,113.92 174.91,183.8 LCD:LCD.9 | ADC:ADC.4 21.59,23.62 v21.59,36.83 21.59,45.72 22.62,46.75
  Bottom 0.254: RTC:RTC.12 68.58,12.7 63.5,12.7 RTC:RTC.6 38.35,37.85 22.61,37.85 v21.59,36.83 | v20.32,106.68 v69.09,106.68 v127,106.68 188.98,106.68 192.02,103.63 198.12,103.63 201.93,107.44 LCD:COLORLATCH.4 | MC:UC.37 v149.86,85.09 162.56,85.09 MC:DEMULTIPLEXER.4
D3  (via drill 0.4)
  Top 0.254: ROM:ROM1.15 38.85,121.68 40.64,119.89 v40.64,105.66 40.64,46.48 ROM:ROM2.15 | RAM:RAM1.15 89.41,119.63 v89.41,105.66 89.41,45.72 88.14,44.45 RAM:RAM2.15 | 7SEG:7SEGLATCH.5 v129.54,105.66 129.54,100.44 130.05,99.93 148.65,99.93 150.02,98.56 150.02,94.73 145.44,90.16 145.44,86.11 142.24,82.9 MC:UC.36 | v149.86,82.55 152.56,85.25 152.56,90.92 175.37,113.73 175.37,181.61 | 175.37,181.72 175.37,181.61 | v11.18,33.53 10.16,32.51 10.16,21.59 v11.43,20.32 | 175.37,181.61 180.34,186.58 LCD:LCD.10
  Bottom 0.254: RTC:RTC.11 68.58,10.16 63.5,10.16 RTC:RTC.7 61.81,11.43 40.73,32.51 12.19,32.51 v11.18,33.53 11.18,35.56 15.49,39.88 37.59,39.88 38.37,40.66 ROM:ROM2.15 | v40.64,105.66 v89.41,105.66 v129.54,105.66 | v11.43,20.32 12.7,19.05 22.61,19.05 ADC:ADC.5 | MC:UC.36 v149.86,82.55 162.56,82.55 MC:DEMULTIPLEXER.5
D4  (via drill 0.4)
  Top 0.254: ROM:ROM1.16 41.66,120.94 v41.66,104.65 v41.66,46.74 41.66,16.26 39.88,14.48 ADC:ADC.14 | RAM:RAM1.16 90.42,121.16 v90.42,104.65 v90.42,47.75 | 7SEG:7SEGLATCH.6 v132.08,104.65 132.08,100.9 132.59,100.39 148.84,100.39 150.47,98.75 150.47,94.54 145.9,89.97 145.9,84.03 142.24,80.36 MC:UC.35 | v149.86,80.01 153.01,83.17 153.01,90.73 175.83,113.54 175.83,179.64 LCD:LCD.11
  Bottom 0.254: v41.66,46.74 38.39,46.74 ROM:ROM2.16 | v90.42,47.75 87.88,47.75 RAM:RAM2.16 | v41.66,104.65 v90.42,104.65 v132.08,104.65 | MC:UC.35 v149.86,80.01 162.56,80.01 MC:DEMULTIPLEXER.6
D5  (via drill 0.4)
  Top 0.254: ROM:ROM1.17 42.67,122.46 v42.67,103.63 v42.67,49.78 v42.67,17.27 | RAM:RAM1.17 91.44,122.68 v91.44,103.63 v91.44,49.78 | 7SEG:7SEGLATCH.7 v134.62,104.14 134.62,101.36 135.13,100.85 149.03,100.85 150.93,98.95 150.93,94.35 146.36,89.78 146.36,81.94 142.24,77.82 MC:UC.34 | v149.86,77.47 153.47,81.08 153.47,90.54 176.28,113.35 176.28,177.56 LCD:LCD.12
  Bottom 0.254: v42.67,49.78 38.86,49.78 ROM:ROM2.17 | v42.67,17.27 30.99,17.27 ADC:ADC.15 | v91.44,49.78 87.38,49.78 RAM:RAM2.17 | v42.67,103.63 v91.44,103.63 134.11,103.63 v134.62,104.14 | MC:UC.34 v149.86,77.47 162.56,77.47 MC:DEMULTIPLEXER.7
D6  (via drill 0.4)
  Top 0.254: ROM:ROM1.18 43.69,123.98 v43.69,102.62 v43.69,51.82 v43.69,19.3 | RAM:RAM1.18 92.46,124.21 v92.46,102.62 v92.46,51.82 | v149.86,74.93 153.93,79 153.93,90.35 176.78,113.2 176.78,175.51 LCD:LCD.13 | 7SEG:7SEGLATCH.8 v137.16,103.63 137.16,101.85 137.67,101.35 137.67,101.31 149.22,101.31 151.39,99.14 151.39,94.16 146.82,89.59 146.82,79.86 142.24,75.28 MC:UC.33
  Bottom 0.254: v43.69,51.82 38.39,51.82 ROM:ROM2.18 | v43.69,19.3 30.99,19.3 ADC:ADC.16 | v92.46,51.82 87.38,51.82 RAM:RAM2.18 | v43.69,102.62 v92.46,102.62 136.14,102.62 v137.16,103.63 | MC:UC.33 v149.86,74.93 162.56,74.93 MC:DEMULTIPLEXER.8
D7  (via drill 0.4)
  Top 0.254: ROM:ROM1.19 44.7,125.51 v44.7,101.6 v44.7,54.86 v44.7,22.35 | RAM:RAM1.19 93.47,125.73 v93.47,101.6 v93.47,54.86 | v149.86,72.39 154.39,76.92 154.39,90.16 177.29,113.06 177.29,173.48 LCD:LCD.14 | 7SEG:7SEGLATCH.9 v139.7,103.12 139.7,102.27 140.21,101.77 149.41,101.77 151.85,99.33 151.85,93.97 147.28,89.4 147.28,77.78 142.24,72.74 MC:UC.32
  Bottom 0.254: v44.7,54.86 38.86,54.86 ROM:ROM2.19 | v44.7,22.35 30.99,22.35 ADC:ADC.17 | v93.47,54.86 87.38,54.86 RAM:RAM2.19 | v44.7,101.6 v93.47,101.6 138.18,101.6 v139.7,103.12 | MC:UC.32 v149.86,72.39 162.56,72.39 MC:DEMULTIPLEXER.9
GND  (via drill 0.4)
  Top 0.508: ROM:ROM2.14 25.53,41.81 MC:C2.2 | CS:C1.2 165.1,69.85 MC:DEMULTIPLEXER.10 | MC:C3.2 64.77,41.91 67.31,44.45 RAM:RAM2.14 | v54.61,25.4 v49.53,20.32 | CLK:CLK.4 127,41.91 MC:UC.20
  pour Bottom (isolate 0.813): 0,194.31 0,0 251.46,0 251.46,194.31
LCD:N$16
  Bottom 0.254: LCD:R10.2 227.33,115.57 162.56,180.34 LCD:LCD.3
LCD:N$17
  Top 0.254: LCD:LCD.16 196.85,185.42 LCD:COLORLATCH.19
LCD:N$23
  Top 0.254: LCD:LCD.17 199.39,185.42 LCD:COLORLATCH.18
LCD:N$24
  Top 0.254: LCD:LCD.18 201.93,185.42 LCD:COLORLATCH.17
LCDCS  (via drill 0.4)
  Top 0.254: CS:CSLGC.21 186.18,54.61 187.96,56.39 187.96,109.98 187.88,110.06 187.88,113.97 187.96,114.05 187.96,181.86 v187.71,182.12
  Bottom 0.254: v187.71,182.12 185.42,184.15 172.72,184.15 LCD:LCD.6
MC:INT0  (via drill 0.4)
  Top 0.254: MC:JPM.3 119.38,172.75 110.84,164.21 110.84,97.41 118.46,89.79 118.46,66.39 v116.84,64.77
  Bottom 0.254: MC:UC.12 v116.84,64.77
MC:INT1  (via drill 0.4)
  Top 0.254: MC:JPM.4 121.92,174.64 111.3,164.02 111.3,97.6 118.92,89.98 118.92,63.04 v118.11,62.23
  Bottom 0.254: MC:UC.13 v118.11,62.23
MC:N$15  (via drill 0.4)
  Top 0.254: MC:RSTSWITCH.1 91.42,187.94 | v106.68,72.39 106.68,159 92.2,173.48 MC:R1.2
  Top 0.508: MC:RSTSWITCH.1 88.9,185.65 88.9,179.07 MC:U$1.2 90.42,177.55 MC:R1.2
  Bottom 0.254: MC:UC.9 v106.68,72.39
MC:RXD  (via drill 0.4)
  Top 0.254: MC:JPM.1 114.3,170.24 114.27,168.94 109.92,164.59 109.92,97.03 117.54,89.41 117.54,73.09 v114.3,69.85
  Bottom 0.254: MC:UC.10 v114.3,69.85
MC:T0  (via drill 0.4)
  Top 0.254: MC:JPM.5 124.46,176.53 111.76,163.83 111.76,97.79 119.38,90.17 v119.38,59.69
  Bottom 0.254: MC:UC.14 v119.38,59.69
MC:TXD  (via drill 0.4)
  Top 0.254: v115.57,67.31 118,69.74 118,89.6 110.38,97.22 110.38,162.56 110.38,163.13 110.38,164.4 116.84,170.86 MC:JPM.2
  Bottom 0.254: MC:UC.11 v115.57,67.31
P3.5  (via drill 0.4)
  Top 0.254: v119.38,57.15 v119.38,41.91
  Bottom 0.254: MC:UC.15 v119.38,57.15 | v119.38,41.91 157.48,41.91 CS:CSLGC.6
PONE0  (via drill 0.4)
  Top 0.254: MC:UC.1 127,92.36 121.25,86.6 121.25,14.64 v125.73,10.16
  Bottom 0.254: v125.73,10.16 204.22,10.16 205.49,8.89 205.49,3.88 KP:KEYPAD.1
PONE1  (via drill 0.4)
  Top 0.254: MC:UC.2 127,89.82 121.71,84.52 121.71,15.45 v125.73,11.43
  Bottom 0.254: v125.73,11.43 206.76,11.43 208.03,10.16 208.03,3.88 KP:KEYPAD.2
PONE2  (via drill 0.4)
  Top 0.254: 125.73,12.89 v125.73,12.7 122.17,16.27 122.17,82.8 MC:UC.3
  Bottom 0.254: v125.73,12.7 209.04,12.7 210.57,11.18 210.57,3.88 KP:KEYPAD.3
PONE3  (via drill 0.4)
  Top 0.254: MC:UC.4 127,84.74 122.62,80.36 122.62,17.08 v125.73,13.97
  Bottom 0.254: v125.73,13.97 211.84,13.97 213.11,12.7 213.11,3.88 KP:KEYPAD.4
PONE4  (via drill 0.4)
  Top 0.254: v125.73,15.24 123.08,17.89 123.08,78.63 MC:UC.5
  Bottom 0.254: v125.73,15.24 213.87,15.24 215.65,13.46 215.65,3.88 KP:KEYPAD.5
PONE5  (via drill 0.4)
  Top 0.254: MC:UC.6 127,79.66 123.54,76.2 123.54,18.7 v125.73,16.51
  Bottom 0.254: v125.73,16.51 216.66,16.51 218.19,14.99 218.19,3.88 KP:KEYPAD.6
PONE6  (via drill 0.4)
  Top 0.254: MC:UC.7 124,74.47 124,19.51 v125.73,17.78
  Bottom 0.254: v125.73,17.78 219.2,17.78 220.73,16.26 220.73,3.88 KP:KEYPAD.7
PONE7  (via drill 0.4)
  Top 0.254: MC:UC.8 125.73,74.93 124.46,73.66 124.46,20.32 v125.73,19.05
  Bottom 0.254: v125.73,19.05 221.23,19.05 223.01,17.27 223.01,4 KP:KEYPAD.8
PSEN
  Bottom 0.254: CS:CSLGC.2 160.02,64.77 MC:UC.29
PWR:N$2
  Top 0.508: PWR:PWRFUSE.1A 31.63,188.33 PWR:S1.3
PWR:N$48
  Top 0.508: PWR:S1.2 23.63,183.64 PWR:PWRJACK.3
PWR:N$49
  Top 0.508: PWR:PWRLED.K PWR:R11.2
RAM1CS  (via drill 0.4)
  Top 0.254: v106.68,36.83 105.41,38.1 105.41,133.35 v104.14,134.62
  Bottom 0.254: CS:CSLGC.15 175.26,39.37 176.53,38.1 176.53,30.48 175.26,29.21 148.59,29.21 140.97,36.83 v106.68,36.83 | v104.14,134.62 RAM:RAM1.20
RAM2CS
  Bottom 0.254: CS:CSLGC.14 173.99,36.83 175.26,35.56 175.26,31.75 173.99,30.48 149.86,30.48 142.24,38.1 96.52,38.1 95.05,39.58 95.05,55.88 93.78,57.15 RAM:RAM2.20
RD  (via drill 0.4)
  Top 0.254: RAM:RAM1.22 95.5,131.32 v95.5,99.57 v95.5,62.99 | v116.84,52.07 v116.84,39.37 | CS:CSLGC.8 160.02,39.37 160.02,5.08 158.75,3.81 57.15,3.81 | ADC:ADC.8 20.32,9.14 20.32,5.08 21.59,3.81 57.15,3.81 | 57.15,3.81 RTC:RTC.8
  Bottom 0.254: RAM:RAM2.22 87.88,62.99 v95.5,62.99 96.52,62.99 98.04,61.47 98.04,52.83 98.81,52.07 v116.84,52.07 MC:UC.17 | v116.84,39.37 160.02,39.37 CS:CSLGC.8
ROM1CS  (via drill 0.4)
  Top 0.254: v50.8,134.62 52.07,133.35 v52.07,34.29
  Bottom 0.254: CS:CSLGC.17 179.07,38.1 179.07,27.94 177.8,26.67 148.59,26.67 140.97,34.29 v52.07,34.29 | v50.8,134.62 38.61,134.62 ROM:ROM1.20 39.41,135.43 39.41,137.35 39.37,137.4 39.37,138.46 ROM:ROM1.22
ROM2CS
  Top 0.254: ROM:ROM2.22 39.62,60.74 39.62,57.91 38.61,56.9 38.39,56.9 ROM:ROM2.20
  Bottom 0.254: CS:CSLGC.16 173.99,41.91 177.8,38.1 177.8,29.21 176.53,27.94 148.59,27.94 141.1,35.43 | ROM:ROM2.20 38.61,57.15 45.72,57.15 46.74,56.13 46.74,36.58 47.88,35.43 141.1,35.43 | 141.1,35.43 140.97,35.56
RTCCS  (via drill 0.4)
  Top 0.254: CS:CSLGC.18 177.8,46.99 179.07,45.72 179.07,7.62 v177.8,6.35
  Bottom 0.254: RTC:RTC.2 60.96,24.13 60.15,24.94 60.15,27.75 61.15,28.75 72.85,28.75 95.25,6.35 v177.8,6.35
VCC  (via drill 0.4)
  Top 0.508: PWR:PWRFUSE.2A 52.83,188.72 53.34,189.23 | 139.7,190.5 142.11,188.09 ROM:C1.1 | 78.74,190.5 84.56,190.5 | 84.56,190.5 139.7,190.5 | 139.7,190.5 140.97,191.77 158.75,191.77 | 83.82,179.07 83.82,185.42 78.74,190.5 | 83.82,179.07 83.82,160.4 ADC:C1.1 87.12,157.1 RAM:RAM1.28 | ROM:ROM1.27 ROM:ROM1.28 38.1,154.97 38.1,165.23 RTC:C1.1 35.94,176.91 38.1,179.07 51.56,179.07 PWR:PWRLED.A 56.39,186.18 53.34,189.23 | ROM:C1.1 144.78,185.29 144.78,140.97 | 144.78,140.97 v144.78,104.14 | RAM:C2.1 171.45,100.33 172.72,99.06 MC:DEMULTIPLEXER.20 | ROM:C2.1 189.23,114.3 190.5,115.57 194.06,115.57 LCD:COLORLATCH.20 | CS:C1.1 171.45,67.31 172.72,66.04 CS:CSLGC.24 | LCD:R10.3 224.79,172.72 205.74,191.77 191.77,191.77 | RTC:RTC.15 69.85,19.22 71.73,21.11 71.73,24.61 69.85,26.5 RTC:RTC.18 69.85,30.48 68.58,31.75 MC:C3.1 66.73,31.75 65.25,30.27 64.03,30.27 63.83,30.48 55.88,30.48 v46.99,22.86 | 53.34,189.23 54.61,190.5 78.74,190.5 | MC:RSTSWITCH.3 84.56,190.5 | 7SEG:DISPLAY.3 7SEG:DISPLAY.8 137.16,183.01 ROM:C1.1 | 118.11,134.75 118.11,138.43 120.65,140.97 144.78,140.97 | ROM:ROM2.28 ROM:ROM2.27 | RAM:C1.1 142.37,92.84 MC:UC.40 | ADC:TEMPSENS.1 12.7,29.46 12.7,16.51 v13.97,15.24 | 7SEG:C1.1 118.11,134.75 | 7SEG:7SEGLATCH.20 118.11,134.62 118.11,134.75 | MC:C2.1 30.73,33.91 ADC:ADC.20 | LCD:LCD.2 160.02,190.5 158.75,191.77 | 158.75,191.77 191.77,191.77 | 191.77,191.77 193.04,190.5 LCD:LCD.15 | MC:U$1.1 85.09,177.8 83.82,179.07
  Bottom 0.508: CS:C1.1 175.26,67.31 176.53,68.58 176.53,99.06 175.26,100.33 RAM:C2.1 170.31,102.74 168.91,104.14 v144.78,104.14 142.37,101.73 RAM:C1.1 106.43,96.77 RAM:RAM2.28 87.12,79.88 LCD:C2.1 83.44,82.55 43.69,82.55 | 43.69,82.55 ROM:ROM2.28 | 43.69,82.55 43.56,82.55 LCD:C1.1 | ADC:TEMPSENS.1 29.46,30.99 ADC:ADC.20 40.13,29.72 v46.99,22.86 46.99,13.97 42.42,9.4 ADC:ADC.12 | MC:C3.1 73.66,31.75 82.55,22.86 CLK:CLK.8 133.35,20.32 179.07,20.32 180.34,21.59 180.34,59.69 177.8,62.23 CS:CSLGC.24 | v13.97,15.24 14.73,14.48 ADC:ADC.7 | LCD:COLORLATCH.20 197.87,119.38 220.9,119.38 LCD:R10.3
WR  (via drill 0.4)
  Top 0.254: RAM:RAM1.27 100.58,138.94 v100.58,94.49 v100.58,75.18 | v118.11,54.61 v118.11,40.64 | RTC:RTC.10 71.12,5.08 157.48,5.08 158.75,6.35 158.75,40.64 CS:CSLGC.7 | ADC:ADC.6 19.86,13.77 19.86,4.89 21.4,3.35 61.93,3.35 61.98,3.3 69.09,3.3 v69.85,2.54
  Bottom 0.254: RAM:RAM2.27 87.38,75.18 v100.58,75.18 100.58,55.88 101.85,54.61 v118.11,54.61 MC:UC.16 | v118.11,40.64 158.75,40.64 CS:CSLGC.7 | v69.85,2.54 RTC:RTC.10

## Text on the board
tNames: RXD | TXD | INT0 | INT1 | T0 | LCD | CONSTRAST | Justin Pachl / ECEN 4330 / University of Nebraska - Omaha